# EAGLE board PCB layout (EAGLE 8.2.2)
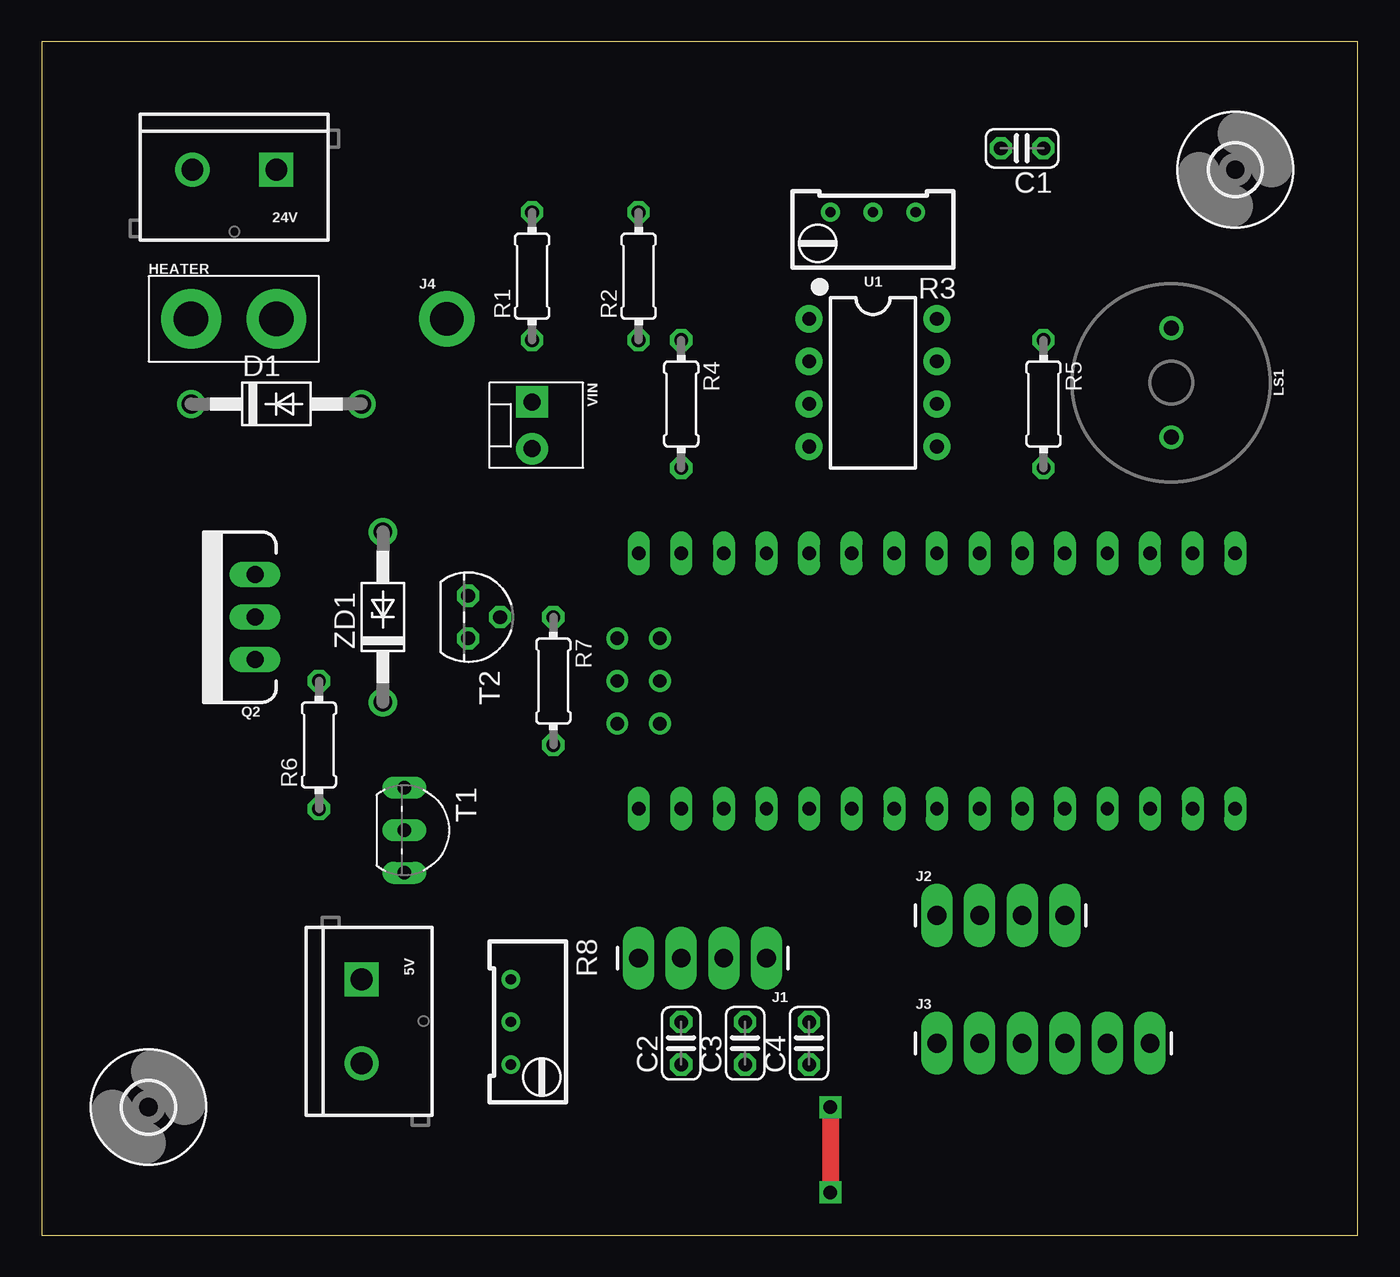
[diagram p0: board, top side]
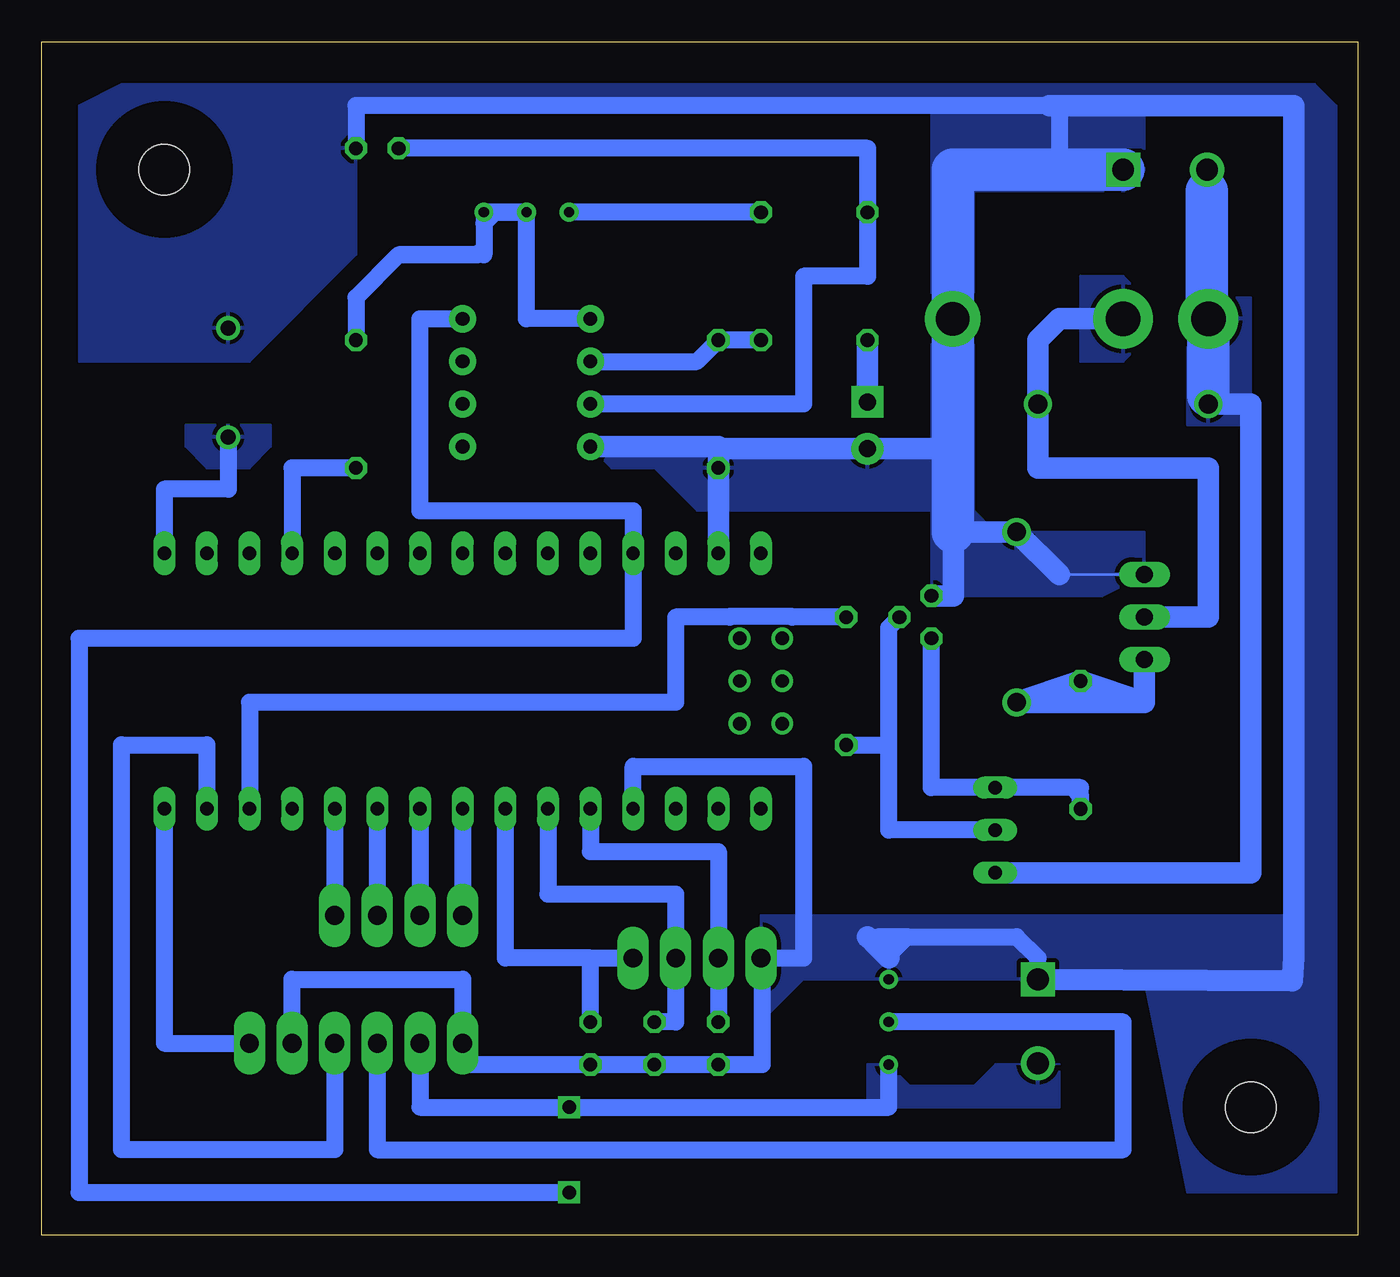
[diagram p1: board, bottom side, seen from below]

Size 78.41 x 71.11 mm. Coordinates in mm from the lower left corner, seen from the top.
Outline: 0,0 78.41,0 78.41,71.11 0,71.11 0,0
Copper layers (1*16): Top 0.035mm / dielectric 1.5mm / Bottom 0.035mm
Design rules "default": minimum track width 6mil, minimum drill 0.35mm, track to track 6mil, track to pad 6mil, pad to pad 6mil, via to via 6mil, smd to smd 6mil, copper to edge 40mil, drill to drill 6mil, minimum pad ring 10mil, minimum via ring 8mil, stop-mask expansion 4mil, vias tented up to drill 0mil, thermal gap 10mil

## Footprints (pad centres in the part's own frame; a part is rotated, then mirrored left to right if it is on the bottom)
SCREWTERMINAL-5MM-2 = drill 1.3 pad 2.032 square: 1 0,0 | drill 1.3 pad 2.032: 2 5,0
C025-024X044 = drill 0.813 octagon: 1 -1.27,0; 2 1.27,0
DO41-10 = drill 1.118: A 5.08,0; C -5.08,0
3,0 = hole 3: 0,0
1X02_XTRA_BIG = drill 2.057 pad 3.556: 1 -2.54,0; 2 2.54,0
1X04_LONGPADS = drill 1.118 pad 1.88 long: 1 0,0; 2 2.54,0; 3 5.08,0; 4 7.62,0
1X06_LONGPADS = drill 1.118 pad 1.88 long: 1 0,0; 2 2.54,0; 3 5.08,0; 4 7.62,0; 5 10.16,0; 6 12.7,0
1X01_2MM = drill 2 pad 3.302: 1 0,0
BUZZER-12MM-NS = drill 0.9: + 3.25,0; - -3.25,0
TO220V = drill 1.016 long: 1 -2.54,0; 2 0,0; 3 2.54,0
0204/7 = drill 0.813 octagon: 1 -3.81,0; 2 3.81,0
RTRIM64W = drill 0.61: 1 1.27,-2.54; 2 1.27,0; 3 1.27,2.54
TO92-EBC-OVAL = drill 0.813 long: B 0,-1.27; C 2.54,-1.27; E -2.54,-1.27
TO92 = drill 0.813 octagon: 1 1.27,0; 2 0,1.905; 3 -1.27,0
DIP08 = drill 0.813 pad 1.626: 1 -3.81,-3.81; 2 -1.27,-3.81; 3 1.27,-3.81; 4 3.81,-3.81; 5 3.81,3.81; 6 1.27,3.81; 7 -1.27,3.81; 8 -3.81,3.81
NANO = drill 0.8 long: 3.3V -10.16,24.13; 5V -10.16,-1.27; A0 -10.16,19.05; A1 -10.16,16.51; A2 -10.16,13.97; A3 -10.16,11.43; A4 -10.16,8.89; A5 -10.16,6.35; A6 -10.16,3.81; A7 -10.16,1.27; AREF -10.16,21.59; D2 5.08,1.27; D3 5.08,3.81; D4 5.08,6.35; D5 5.08,8.89; D6 5.08,11.43; D7 5.08,13.97; D8 5.08,16.51; D9 5.08,19.05; D10 5.08,21.59; D11 5.08,24.13; D12 5.08,26.67; D13 -10.16,26.67; GND -10.16,-6.35; GND1 5.08,-1.27; RAW -10.16,-8.89; RST -10.16,-3.81; RST1 5.08,-3.81; RX1 5.08,-6.35; TX0 5.08,-8.89 | drill 0.8: ICSP1 -5.08,-10.16; ICSP2 -5.08,-7.62; ICSP3 -2.54,-10.16; ICSP4 -2.54,-7.62; ICSP5 0,-10.16; ICSP6 0,-7.62
MOLEX-1X2_LOCK = drill 1.016 pad 1.88 square: 1 -0.127,0 | drill 1.016 pad 1.88: 2 2.667,0
DO41Z10 = drill 1.118: A 5.08,0; C -5.08,0

## Placement (x,y rotation side)
5V  [SCREWTERMINAL-5MM-2]  19.05,15.24 270 top
24V  [SCREWTERMINAL-5MM-2]  13.97,63.5 180 top
C1  0.1uF  [C025-024X044]  58.42,64.77 180 top
C2  0.1uF  [C025-024X044]  38.1,11.43 90 top
C3  0.1uF  [C025-024X044]  41.91,11.43 90 top
C4  0.1uF  [C025-024X044]  45.72,11.43 90 top
D1  UF5402  [DO41-10]  13.97,49.53 0 top
H1  MOUNT-HOLE3.0  [3,0]  6.35,7.62 0 top
H2  MOUNT-HOLE3.0  [3,0]  71.12,63.5 0 top
HEATER  [1X02_XTRA_BIG]  11.43,54.61 0 top
J1  ENC  [1X04_LONGPADS]  43.18,16.51 180 top
J2  LCD2  [1X04_LONGPADS]  53.34,19.05 0 top
J3  LCD1  [1X06_LONGPADS]  53.34,11.43 0 top
J4  [1X01_2MM]  24.13,54.61 0 top
LS1  BUZZER  [BUZZER-12MM-NS]  67.31,50.8 270 top
Q2  IRFZ44  [TO220V]  12.7,36.83 90 top
R1  10K  [0204/7]  29.21,57.15 90 top
R2  560K  [0204/7]  35.56,57.15 90 top
R3  200K  [RTRIM64W]  49.53,59.69 90 top
R4  1K  [0204/7]  38.1,49.53 270 top
R5  470  [0204/7]  59.69,49.53 270 top
R6  100  [0204/7]  16.51,29.21 90 top
R7  1K  [0204/7]  30.48,33.02 270 top
R8  10K  [RTRIM64W]  29.21,12.7 180 top
T1  2N2222  [TO92-EBC-OVAL]  22.86,24.13 270 top
T2  BC557  [TO92]  25.4,36.83 270 top
U1  LM358  [DIP08]  49.53,50.8 270 top
U$1  NANO  [NANO]  44.45,30.48 270 top
VIN  [MOLEX-1X2_LOCK]  29.21,49.53 270 top
ZD1  15V  [DO41Z10]  20.32,36.83 90 top

## Library data of the parts
5V 24V = SparkFun-Connectors; SF_SKU: PRT-08432
C1-C4 R1-R8 = resistor
D1 ZD1 = diode
H1 H2 = holes
HEATER J3 J4 = SparkFun-Connectors
J1 J2 = SparkFun-Connectors; PROD_ID: CONN-09696
LS1 = SparkFun-Electromechanical; PROD_ID: COMP-08253; SF_SKU: COM-07950
Q2 = SparkFun-DiscreteSemi; PROD_ID: TRANS-10060
T1 = adafruit
T2 = transistor-pnp
U1 = SparkFun-IC-Amplifiers; PROD_ID: IC-09172
U$1 = Arduino-clone
VIN = SparkFun-Connectors; SF_ID: PRT-09918

## Nets
5V: 5V.2 J3.2 R8.3 U1.8 U$1.5V
GND: 5V.1 24V.1 C1.1 C2.1 C3.1 C4.1 J1.4 J3.1 J3.5 J4.1 LS1.- Q2.3 R4.2 R8.1 T2.3 U1.4 U$1.GND U$1.GND1 VIN.2 ZD1.A
N$1: C1.2 R1.2 U1.3
N$2: R2.1 R4.1 U1.2
N$3: R1.1 VIN.1
N$4: R2.2 R3.3
N$5: R3.1 R3.2 R5.1 U1.1
N$6: R5.2 U$1.A0
N$7: R7.1 U$1.D10
N$8: D1.A HEATER.2 Q2.2
N$10: C4.2 J1.1 U$1.D4
N$11: R7.2 T1.B T2.2
N$12: R6.1 T1.E T2.1
N$13: Q2.1 R6.2 ZD1.C
N$14: C3.2 J1.2 U$1.D3
N$15: C2.2 J1.3 U$1.D2
N$16: J2.1 U$1.D5
N$17: J2.2 U$1.D6
N$18: J3.3 R8.2
N$19: J2.3 U$1.D7
N$20: J2.4 U$1.D8
N$21: LS1.+ U$1.D13
N$22: J3.6 U$1.D12
N$23: J3.4 U$1.D11
VCC_1: 24V.2 D1.C HEATER.1 T1.C

## Tracks (layer width: path | path; a pad name or v marks a point on that pad's centre or on a via)
5V  (via drill 0.8 pad 1.3)
  Top 1.016: v46.99,7.62 v46.99,2.54
  Bottom 1.016: J3.2 55.88,7.62 v46.99,7.62 27.94,7.62 R8.3 | v46.99,2.54 76.2,2.54 76.2,35.56 43.18,35.56 U$1.5V 43.18,43.18 55.88,43.18 55.88,54.61 U1.8
  pour Bottom: 19.05,10.16 21.59,10.16 22.86,8.89 26.67,8.89 27.94,10.16 29.21,10.16 29.21,7.62 19.05,7.62 17.78,7.62 17.78,10.16
GND  (via drill 0.35)
  Bottom 0.152: Q2.3 17.78,39.37
  Bottom 0.2: J4.1 24.13,54.65
  Bottom 0.813: 24V.1 17.78,63.5 17.78,66.04
  Bottom 1.016: 18.12,63.5 17.78,63.84 17.78,67.31 18.35,67.31 59.69,67.31 C1.1 | 5V.1 19.05,16.51 20.32,17.78 26.85,17.78 | 26.85,17.78 28.51,17.78 28.86,17.43 | 27.94,16.69 26.85,17.78 | J3.5 63.5,15.24 53.34,15.24 J3.1 53.34,10.16 C4.1 C3.1 C2.1 35.47,10.16 35.47,16.51 | U$1.GND1 43.18,27.94 33.02,27.94 33.02,16.51 35.47,16.51 | 35.47,16.51 J1.4
  Bottom 1.27: U$1.GND R4.2 38.1,46.99 | 38.1,46.99 U1.4 | 24.08,41.91 ZD1.A 17.78,39.37 | 24.13,41.91 24.08,41.91 | T2.3 24.08,38.1 24.08,41.91 | 5V.1 3.89,15.16 3.81,16.51 3.81,67.31 18.35,67.31 | 38.1,46.99 37.97,46.86 VIN.2 24.13,46.86 24.13,45.72 | 27.94,16.51 28.86,17.43 29.21,17.78
  Bottom 2.54: 24V.1 18.12,63.5 24.13,63.5 24.13,54.65 24.13,45.72 24.13,41.91
  other vias: 43.18,25.4
  pour Bottom: 62.23,63.5 59.69,64.77 59.69,67.31 25.4,67.31 25.4,39.37 24.13,38.1 15.24,38.1 12.7,39.37 12.7,41.91 21.59,41.91 22.86,43.18 22.86,62.23 12.7,62.23 12.7,67.31 3.81,67.31 3.81,19.05 35.56,19.05 35.56,12.7 33.02,15.24 12.7,15.24 10.16,2.54 1.27,2.54 1.27,67.31 2.54,68.58 62.23,68.58
  pour Bottom: 59.69,68.58 59.69,58.42 66.04,52.07 76.2,52.07 76.2,67.31 73.66,68.58
  pour Bottom: 45.72,46.99 24.13,46.99 24.13,38.1 25.4,38.1 25.4,43.18 39.37,43.18 41.91,45.72 44.45,45.72
N$1
  Bottom 1.016: C1.2 29.21,64.77 R1.2 29.21,57.15 33.02,57.15 33.02,49.53 U1.3
N$2
  Bottom 1.016: U1.2 39.37,52.07 R4.1 R2.1
N$3
  Bottom 1.27: R1.1 VIN.1
N$4
  Bottom 1.016: R2.2 R3.3
N$5
  Bottom 0.813: R3.1 52.07,60.3 52.07,58.42 52.46,58.42
  Bottom 1.016: R3.2 51.41,60.96 52.07,60.3 | R3.1 52.07,58.82 52.46,58.42 | 57.15,58.42 59.69,55.88 R5.1 | U1.1 49.53,54.61 R3.2 | R3.2 R3.1 | R3.1 52.07,58.42 52.46,58.42 | 52.46,58.42 57.15,58.42 | 57.15,58.42 52.46,58.42
N$6
  Bottom 1.016: R5.2 63.5,45.72 U$1.A0
N$7
  Bottom 1.016: R7.1 33.7,36.83 33.75,36.87 37.37,36.87 37.42,36.83 40.64,36.83 40.64,31.75 66.04,31.75 U$1.D10
N$8
  Bottom 1.27: HEATER.2 17.78,54.61 19.05,53.34 D1.A 19.05,45.72 8.89,45.72 8.89,36.83 Q2.2
  pour Bottom: 12.7,54.61 12.7,55.88 13.97,57.15 16.51,57.15 16.51,52.07 13.97,52.07 12.7,53.34
N$10
  Bottom 1.016: U$1.D4 50.8,16.51 45.72,16.51 | 45.72,16.51 J1.1 | C4.2 45.72,16.51
N$11
  Bottom 1.016: T1.B 27.94,24.13 27.94,29.21 | 27.94,29.21 27.94,36.2 T2.2 | R7.2 27.94,29.21
N$12
  Bottom 1.016: 17.01,26.67 16.51,26.17 R6.1 16.51,26.67 T1.E 25.4,26.67 T2.1
N$13
  Bottom 1.27: 12.7,31.75 Q2.1 | 12.7,31.75 ZD1.C R6.2 12.7,31.75
N$14
  Bottom 1.016: U$1.D3 48.26,20.32 40.64,20.32 J1.2 40.64,12.7 C3.2
N$15
  Bottom 1.016: U$1.D2 45.72,22.86 38.1,22.86 J1.3 C2.2
N$16
  Bottom 1.016: U$1.D5 J2.1
N$17
  Bottom 1.016: U$1.D6 J2.2
N$18
  Bottom 1.016: J3.3 58.42,5.08 13.97,5.08 13.97,12.7 R8.2
N$19
  Bottom 1.016: U$1.D7 J2.3
N$20
  Bottom 1.016: U$1.D8 J2.4
N$21
  Bottom 1.016: LS1.+ 67.31,44.45 71.12,44.45 U$1.D13
  pour Bottom: 64.77,48.26 69.85,48.26 69.85,46.99 68.58,45.72 66.04,45.72 64.77,46.99
N$22
  Bottom 1.016: U$1.D12 71.12,11.43 J3.6
N$23
  Bottom 1.016: J3.4 60.96,5.08 73.66,5.08 73.66,29.21 68.58,29.21 U$1.D11
VCC_1
  Bottom 0.152: 8.97,62.23 24V.2
  Bottom 1.27: 8.89,50.02 D1.C 6.35,49.53 6.35,21.59 T1.C
  Bottom 2.54: 8.97,62.23 8.97,54.61 HEATER.1 8.89,50.02
  pour Bottom: 6.35,49.53 6.35,55.88 10.16,55.88 10.16,48.26 6.35,48.26